# Altium PCB ExtPlatePCB1.PcbDoc
Units mm, origin at the board's own origin, x right, y up, seen from the top; angles counter-clockwise.
Board outline 68.58 x 53.34 mm, 2 copper layers (Top Layer, Bottom Layer); 83 components, 75 nets, 307 pads, 31 vias.
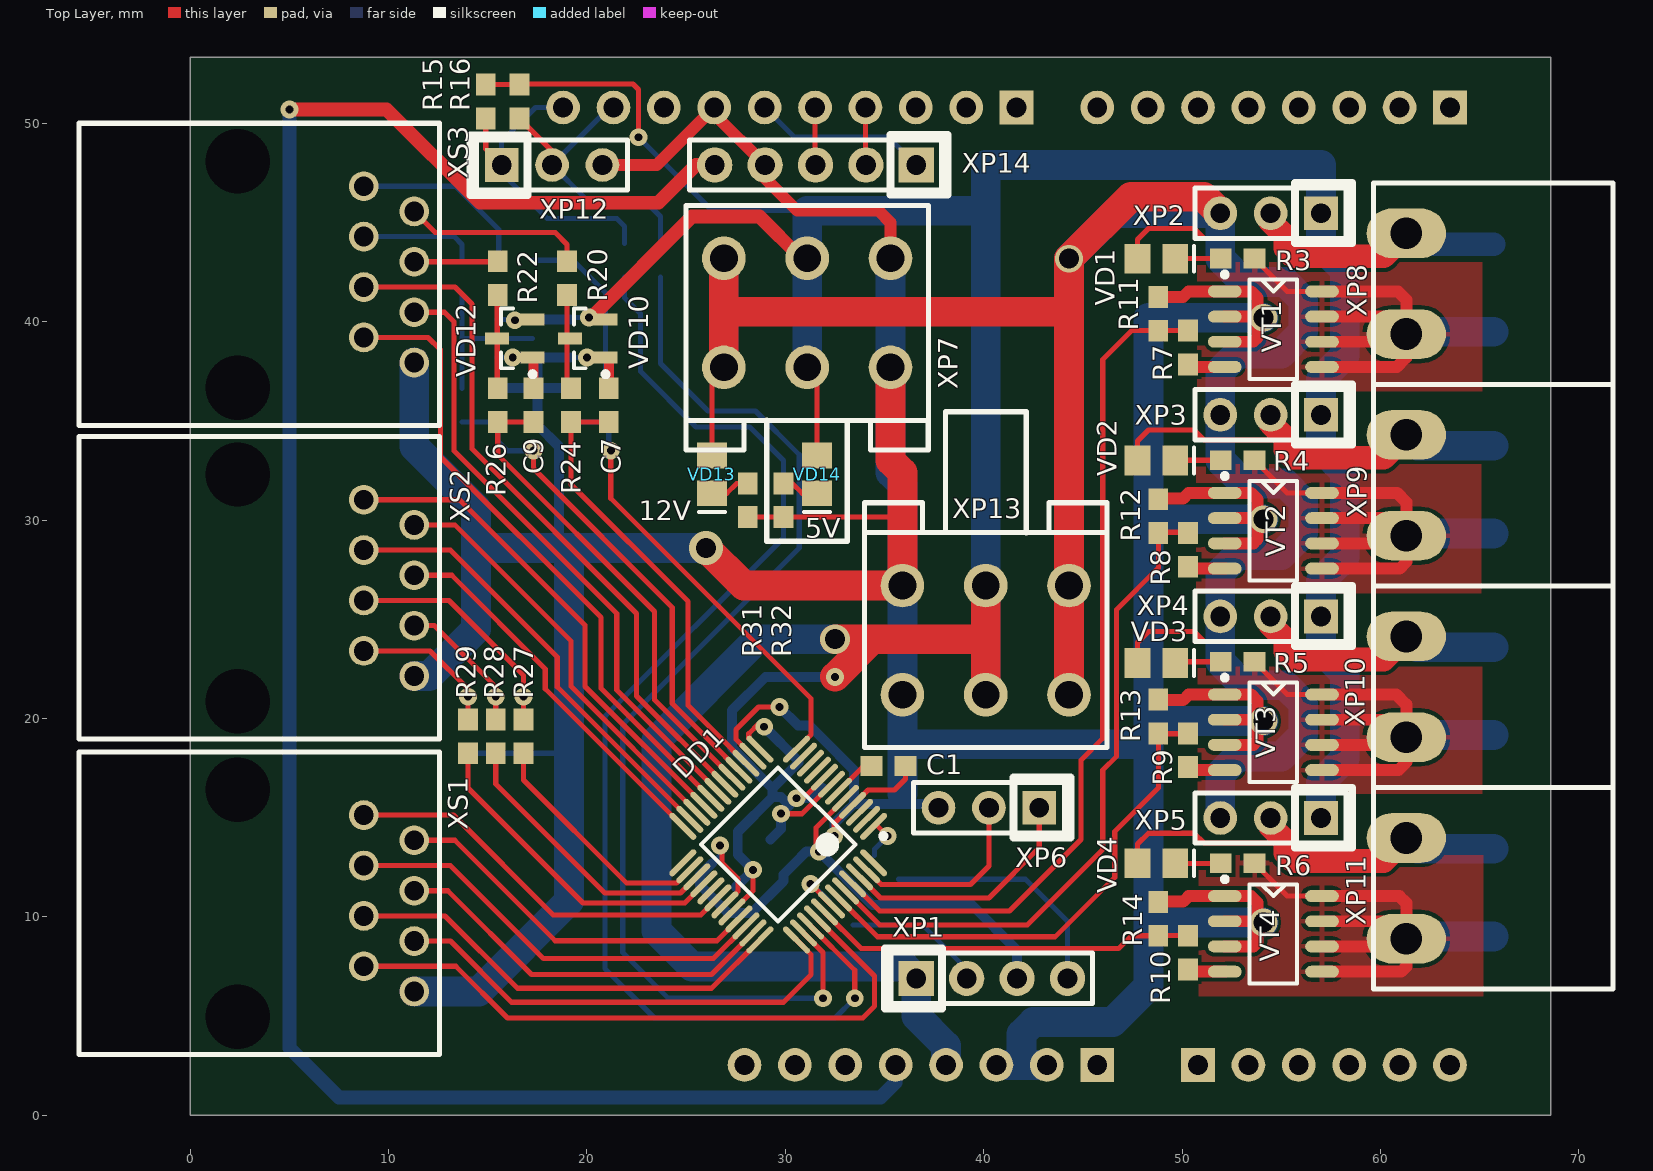
[diagram p0: Top Layer view]
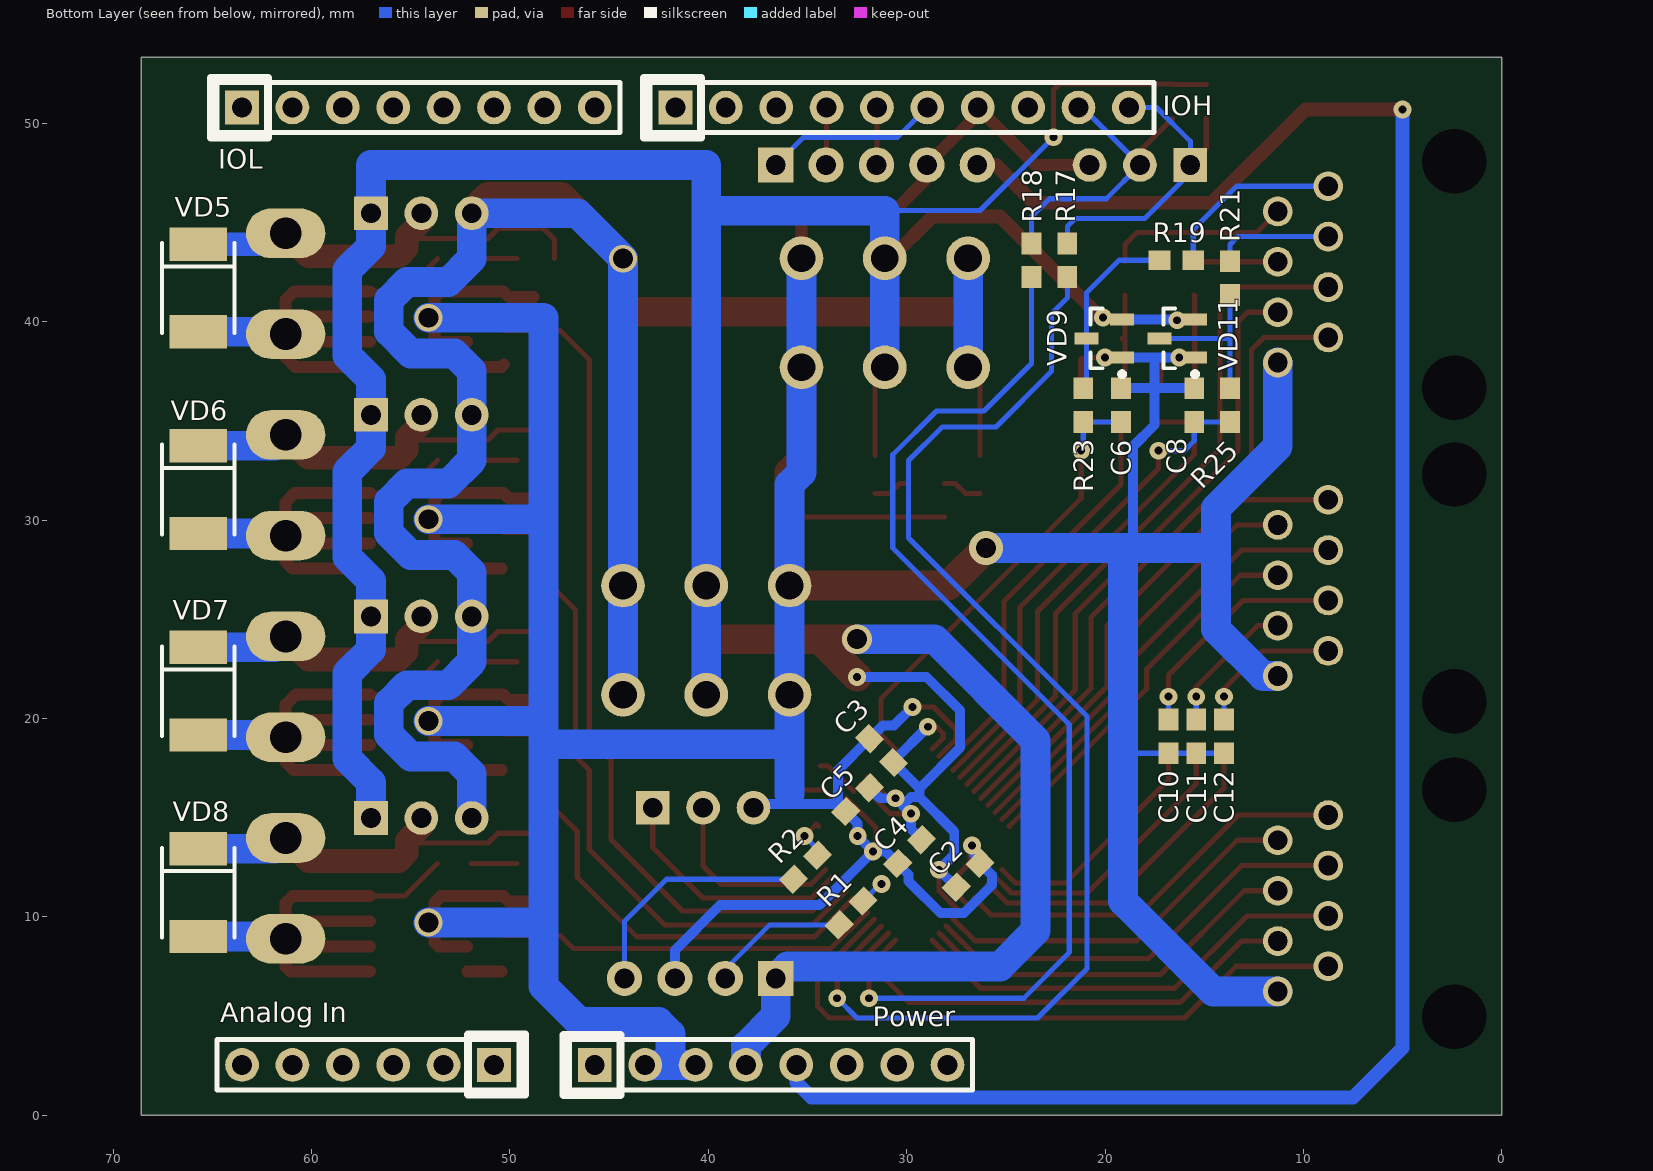
[diagram p1: Bottom Layer view, seen from below]
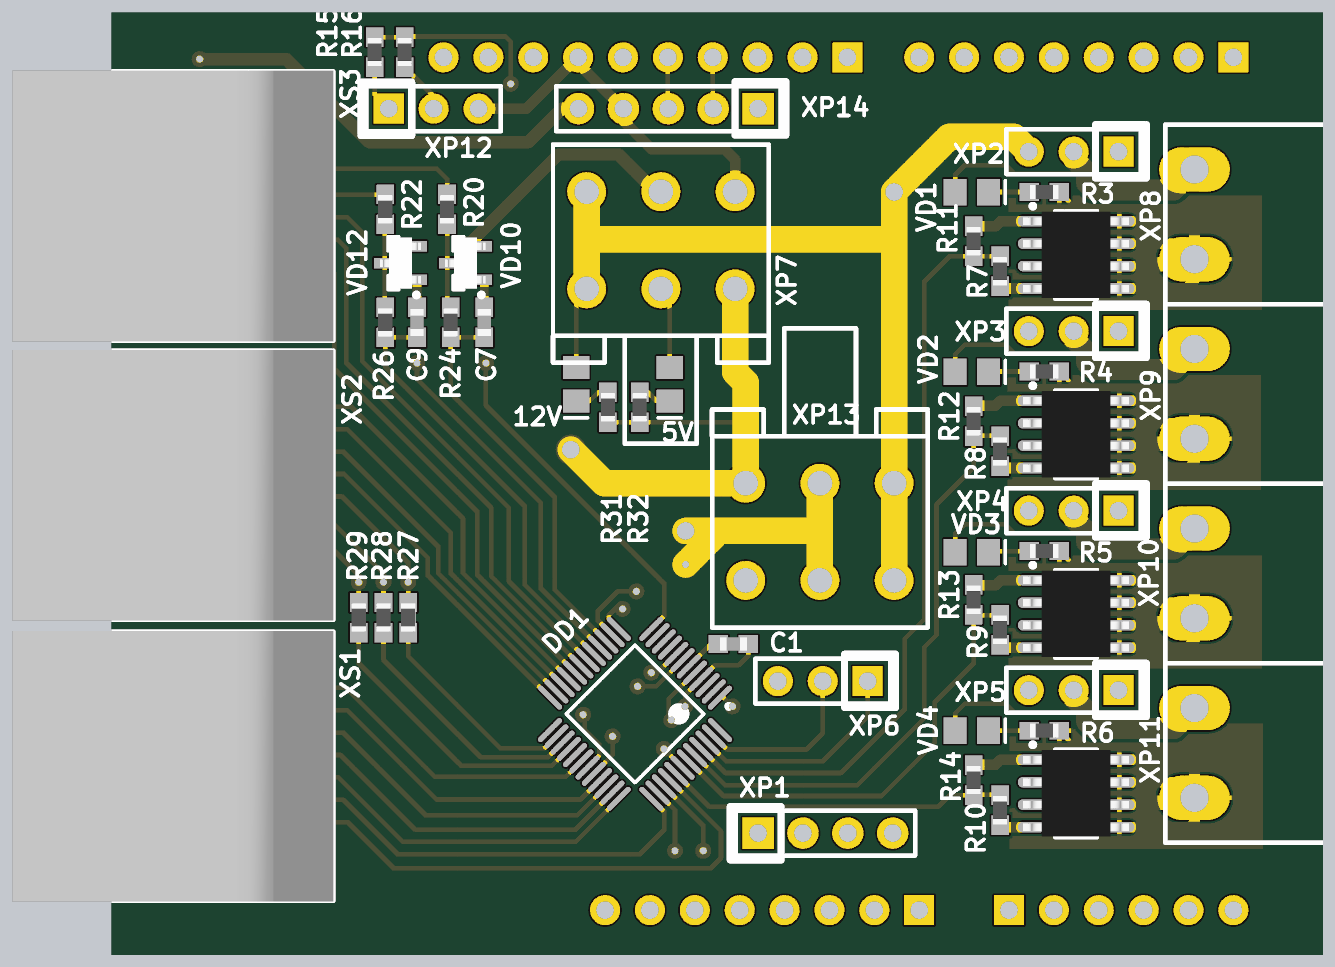
[diagram p2: 3D render of the assembled board from above, using the file's embedded part models]
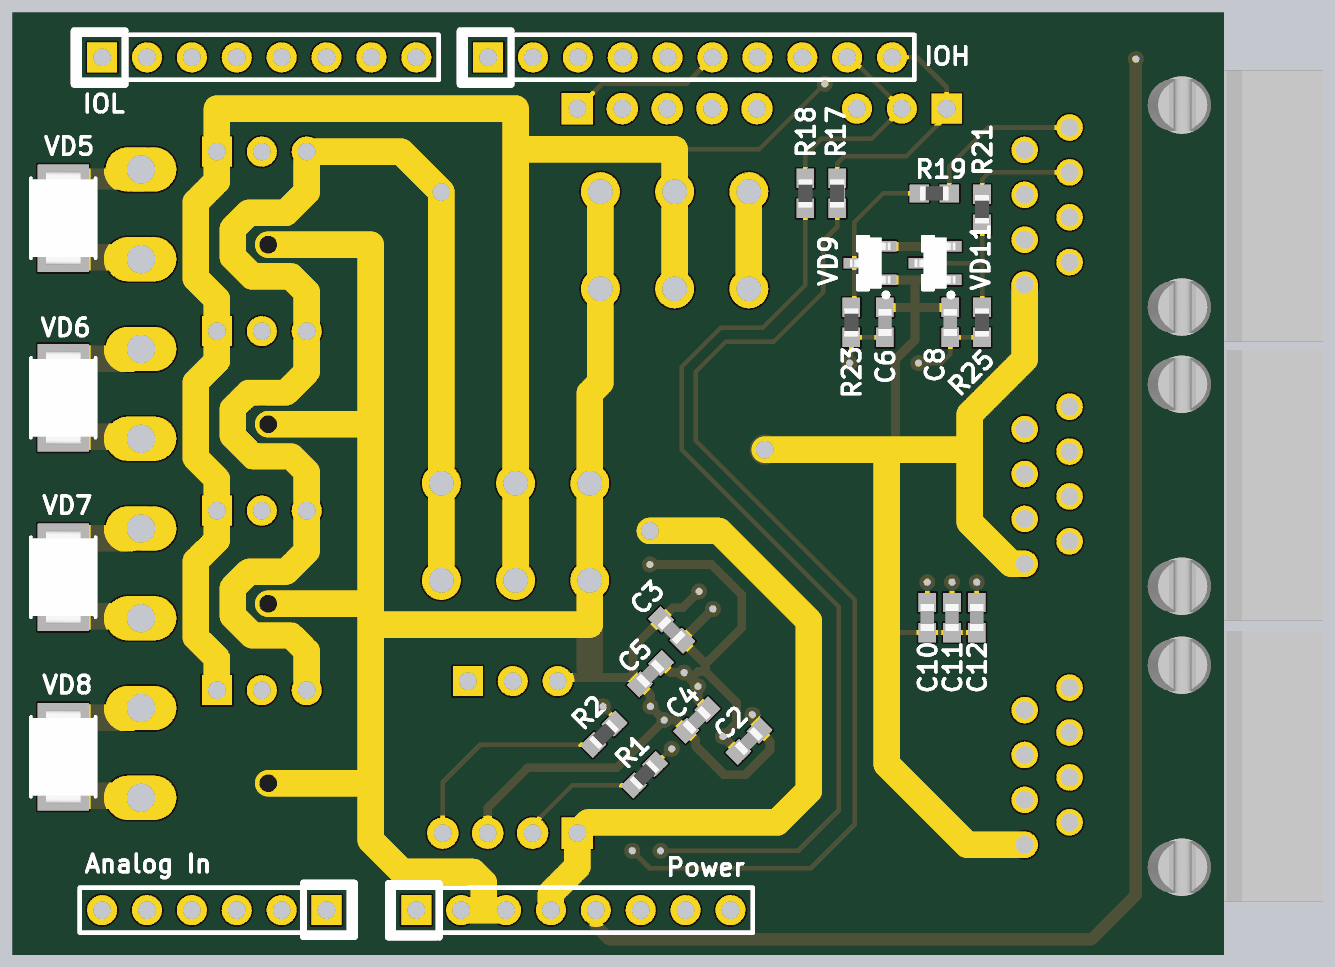
[diagram p3: 3D render of the assembled board from below, using the file's embedded part models]

## Layer stack, top to bottom
Top Layer: signal copper 0.0356
Dielectric: dielectric 0.32, FR-4, Dk 4.8
Bottom Layer: signal copper 0.0356

## Board outline
0,0 68.58,0 68.58,53.34 0,53.34

## Design rules (kind name [scope] priority, off if disabled: settings)
Clearance [All] p1: gap=0.2
PolygonConnect [All] p1: connectstyle=Relief reliefconductorwidth=0.254 reliefentries=4 polygonreliefangle="90 Angle"
RoutingVias [All] p1: holewidth=0.4 width=0.9 viastyle="Through Hole" minholewidth=0.4 minwidth=0.9 maxholewidth=5 maxwidth=5
SilkscreenOverComponentPads [All] p1: minsilkscreentomaskgap=0.254
SolderMaskExpansion [All] p1: expansion=0.102
Width [All] p1: maxlimit=4 minlimit=0.2 preferedwidth=0.26
27 further rules are at their usual default settings.

## Components (designator, comment, footprint, x,y, rotation, side; value= is the part's Value field where it differs from the comment)
"Analog In" "AD" PLS6 50.8,2.54 r0 bottom locked (schematic designator AD1)
C1 "1.0uF" C-1608[0603] 35.2,17.6 r180 top
C2 "0.1uF" C-1608[0603] 26.9,12.1 r135 bottom
C3 "0.1uF" C-1608[0603] 31.266,18.384 r45 bottom
C4 "0.1uF" C-1608[0603] 29.851,13.293 r315 bottom
C5 "0.1uF" C-1608[0603] 32.468,15.909 r315 bottom
C6 "1nF" C-1608[0603] 19.2,35.8 r90 bottom
C7 "1nF" C-1608[0603] 21.1,35.8 r90 top
C8 "1nF" C-1608[0603] 15.5,35.8 r90 bottom
C9 "1nF" C-1608[0603] 17.3,35.8 r90 top
C10 "0.1uF" C-1608[0603] 16.8,19.1 r270 bottom
C11 "0.1uF" C-1608[0603] 15.4,19.1 r270 bottom
C12 "0.1uF" C-1608[0603] 14,19.1 r270 bottom
DD1 "STM8S105C6" LQFP48_N 29.639,13.646 r225 top
IOH "IOH" PLS10 41.656,50.8 r180 bottom locked (schematic designator IOH1)
IOL "IOL" PLS8 63.5,50.8 r180 bottom locked (schematic designator IOL1)
Power "POWER_UNO" PLS8 45.72,2.54 r180 bottom locked (schematic designator POWER1)
R1 "100" R-1608[0603] 32.8,10.2 r135 bottom
R2 "100" R-1608[0603] 35.1,12.5 r135 bottom
R3 "1K" R-1608[0603] 52.8,43.18 r0 top
R4 "1K" R-1608[0603] 52.8,33.02 r0 top
R5 "1K" R-1608[0603] 52.8,22.86 r0 top
R6 "1K" R-1608[0603] 52.8,12.7 r0 top
R7 "1K" R-1608[0603] 50.3,38.7 r90 top
R8 "1K" R-1608[0603] 50.3,28.5 r90 top
R9 "1K" R-1608[0603] 50.3,18.4 r90 top
R10 "1K" R-1608[0603] 50.3,8.2 r90 top
R11 "10K" R-1608[0603] 48.8,40.4 r270 top
R12 "10K" R-1608[0603] 48.8,30.2 r270 top
R13 "10K" R-1608[0603] 48.8,20.1 r270 top
R14 "10K" R-1608[0603] 48.8,9.9 r270 top
R15 "4.7K" R-1608[0603] 14.9,51.1 r90 top
R16 "4.7K" R-1608[0603] 16.6,51.1 r90 top
R17 "100" R-1608[0603] 21.9,43.1 r90 bottom
R18 "100" R-1608[0603] 23.7,43.1 r90 bottom
R19 "4.7K" R-1608[0603] 16.4,43.1 r180 bottom
R20 "4.7K" R-1608[0603] 19,42.2 r90 top
R21 "4.7K" R-1608[0603] 13.7,42.2 r90 bottom
R22 "4.7K" R-1608[0603] 15.5,42.2 r90 top
R23 "4.7K" R-1608[0603] 21.1,35.8 r90 bottom
R24 "4.7K" R-1608[0603] 19.2,35.8 r90 top
R25 "4.7K" R-1608[0603] 13.7,35.8 r90 bottom
R26 "4.7K" R-1608[0603] 15.5,35.8 r90 top
R27 "750" R-1608[0603] 16.8,19.1 r90 top
R28 "750" R-1608[0603] 15.4,19.1 r90 top
R29 "750" R-1608[0603] 14,19.1 r90 top
R31 "1K" R-1608[0603] 28.1,31 r270 top
R32 "510" R-1608[0603] 29.9,31 r270 top
VD1 "KB170G" LED-2012[0805] 48.7,43.18 r180 top
VD2 "KB170G" LED-2012[0805] 48.7,33 r180 top
VD3 "KB170G" LED-2012[0805] 48.7,22.8 r180 top
VD4 "KB170G" LED-2012[0805] 48.7,12.7 r180 top
VD5 "MBRS140T3G" SMB 65.7,41.7 r270 bottom
VD6 "MBRS140T3G" SMB 65.7,31.54 r270 bottom
VD7 "MBRS140T3G" SMB 65.7,21.38 r270 bottom
VD8 "MBRS140T3G" SMB 65.7,11.22 r270 bottom
VD9 "BAT54S" SOT-23 20.038,39.156 r0 bottom
VD10 "BAT54S" SOT-23 20.038,39.156 r180 top
VD11 "BAT54S" SOT-23 16.362,39.156 r0 bottom
VD12 "BAT54S" SOT-23 16.362,39.156 r180 top
VD13 "12V" LED-2012[0805] 26.3,32.3 r90 top
VD14 "5V" LED-2012[0805] 31.6,32.3 r90 top
VT1 "IRF3717" SO8 54.6,39.624 r0 top
VT2 "IRF3717" SO8 54.6,29.464 r0 top
VT3 "IRF3717" SO8 54.6,19.304 r0 top
VT4 "IRF3717" SO8 54.6,9.144 r0 top
XP1 "PLS-4" PLS4 36.6,6.9 r0 top
XP2 "PLS-3" PLS3 57,45.466 r180 top
XP3 "PLS-3" PLS3 57,35.306 r180 top
XP4 "PLS-3" PLS3 57,25.146 r180 top
XP5 "PLS-3" PLS3 57,14.986 r180 top
XP6 "PLS-3" PLS3 42.8,15.5 r180 top
XP7 "MF-6M" MF-6M 26.9,37.7 r0 top
XP8 "2EDGR-5.08" 2EDGR-5.08 61.3,44.457 r0 top locked
XP9 "2EDGR-5.08" 2EDGR-5.08 61.3,34.297 r0 top locked
XP10 "2EDGR-5.08" 2EDGR-5.08 61.3,24.137 r0 top locked
XP11 "2EDGR-5.08" 2EDGR-5.08 61.3,13.977 r0 top locked
XP12 "PLS-3" PLS3 15.7,47.9 r0 top
XP13 "MF-6M" MF-6M 44.3,26.7 r180 top
XP14 "PLS-5" PLS5 36.6,47.9 r180 top
XS1 "5555164-1" "RJ45 8PIN" 2.4,16.4 r270 top
XS2 "5555164-1" "RJ45 8PIN" 2.4,32.3 r270 top
XS3 "5555164-1" "RJ45 8PIN" 2.4,48.1 r270 top

## Footprints (in the part's own frame and the unit in brackets; to place one, negate y for a bottom-side part, rotate by r counter-clockwise, add the part's x,y. Pads: shape width x height; smd on the part's side, far side on the other; paste and mask are expansions set on the pad)
2EDGR-5.08 [mm]
  oval 4x2.5 hole 1.6: 1(0,0) 2(0,-5.08)
  silkscreen extent -1.65,-7.62 10.41,2.54, body extent -1.52,-7.49 10.29,2.41, height 8.3
C-1608[0603] [mm]
  rect 1.1x1 smd: 1(-0.85,0) 2(0.85,0)
  body extent -0.76,-0.38 0.76,0.38, height 0.5
LED-2012[0805] [mm]
  rect 1.3x1.5 smd: 1(-0.95,0) 2(0.95,0)
  silkscreen extent -1.9,-0.65 -1.9,0.65, body extent -1.4,-0.76 1.4,0.76, height 1.1
LQFP48_N [mm] "Thin QFP, 48-Leads, Body 7x7mm, Pitch 0.5mm, IPC Medium Density"
  oval 1.8x0.3 smd: 1(-4.05,2.75) 2(-4.05,2.25) 3(-4.05,1.75) 4(-4.05,1.25) 5(-4.05,0.75) 6(-4.05,0.25) 7(-4.05,-0.25) 8(-4.05,-0.75) 9(-4.05,-1.25) 10(-4.05,-1.75) 11(-4.05,-2.25) 12(-4.05,-2.75) 25(4.05,-2.75) 26(4.05,-2.25) 27(4.05,-1.75) 28(4.05,-1.25) 29(4.05,-0.75) 30(4.05,-0.25) 31(4.05,0.25) 32(4.05,0.75) 33(4.05,1.25) 34(4.05,1.75) 35(4.05,2.25) 36(4.05,2.75)
  oval 0.3x1.8 smd: 13(-2.75,-4.05) 14(-2.25,-4.05) 15(-1.75,-4.05) 16(-1.25,-4.05) 17(-0.75,-4.05) 18(-0.25,-4.05) 19(0.25,-4.05) 20(0.75,-4.05) 21(1.25,-4.05) 22(1.75,-4.05) 23(2.25,-4.05) 24(2.75,-4.05) 37(2.75,4.05) 38(2.25,4.05) 39(1.75,4.05) 40(1.25,4.05) 41(0.75,4.05) 42(0.25,4.05) 43(-0.25,4.05) 44(-0.75,4.05) 45(-1.25,4.05) 46(-1.75,4.05) 47(-2.25,4.05) 48(-2.75,4.05)
  silkscreen extent -4.17,-2.75 2.75,3.57, body extent -3.5,-3.5 3.5,3.5, height 1.6
MF-6M [mm]
  round 2.2 hole 1.4: 1(0,5.5) 2(4.2,5.5) 3(8.4,5.5) 4(0,0) 5(4.2,0) 6(8.4,0)
  silkscreen extent -1.91,-8.76 10.31,8.17, body extent -1.91,-2.67 10.31,8.17, height 12.9
PLS3 [mm]
  rect 1.7x1.7 hole 1: 1(0,0)
  round 1.7 hole 1: 2(2.54,0) 3(5.08,0)
  silkscreen extent -1.58,-1.53 6.35,1.5, body extent -1.27,-1.3 6.3,1.3, height 8.54
PLS4 [mil]
  rect 70x70 hole 39.37: 1(0,0)
  round 70 hole 39.37: 2(100,0) 3(200,0) 4(300,0)
  silkscreen extent -62,-60 350,59, body extent -50,-50 350,50, height 336
PLS5 [mil]
  rect 70x70 hole 39.37: 1(0,0)
  round 70 hole 39.37: 2(100,0) 3(200,0) 4(300,0) 5(400,0)
  silkscreen extent -62,-60 450,59, body extent -50,-50 450,50, height 336
PLS6 [mm]
  rect 1.7x1.7 hole 1: 1(0,0)
  round 1.7 hole 1: 2(2.54,0) 3(5.08,0) 4(7.62,0) 5(10.16,0) 6(12.7,0)
  silkscreen extent -1.58,-1.53 13.97,1.5, body extent -1.27,-1.27 13.97,1.27, height 8.54
PLS8 [mm]
  rect 1.7x1.7 hole 1: 1(0,0)
  round 1.7 hole 1: 2(2.54,0) 3(5.08,0) 4(7.62,0) 5(10.16,0) 6(12.7,0) 7(15.24,0) 8(17.78,0)
  silkscreen extent -1.58,-1.53 19.05,1.5, body extent -1.27,-1.27 19.05,1.27, height 8.54
PLS10 [mm]
  rect 1.7x1.7 hole 1: 1(0,0)
  round 1.7 hole 1: 2(2.54,0) 3(5.08,0) 4(7.62,0) 5(10.16,0) 6(12.7,0) 7(15.24,0) 8(17.78,0) 9(20.32,0) 10(22.86,0)
  silkscreen extent -1.58,-1.53 24.13,1.5, body extent -1.27,-1.27 24.13,1.27, height 8.54
R-1608[0603] [mm]
  rect 1.1x1 smd: 1(-0.85,0) 2(0.85,0)
  body extent -1.2,-1.2 1.2,1.2, height 0.37
"RJ45 8PIN" [mm]
  round 0 hole 3.25 unplated: 0(0,0) 0(11.43,0)
  round 1.5 hole 1: 1(1.27,6.35) 2(2.54,8.89) 3(3.81,6.35) 4(5.08,8.89) 5(6.35,6.35) 6(7.62,8.89) 7(8.89,6.35) 8(10.16,8.89)
  silkscreen extent -1.91,-8 13.34,10.16, body extent -1.94,-8 13.37,10.16, height 12.29
SMB [mil] "http://www.vishay.com/docs/95017/smb.pdf"
  rect 66x114 smd mask+4: 1(-87,0) 2(87,0)
  silkscreen extent -89,-72 89,72, body extent -104,-70 104,70, height 85
SO8 [mm] "SOIC, 8-Leads, Body 4.9x3.9mm, Pitch 1.27mm, IPC High Density"
  oval 1.7x0.6 smd: 1(-2.45,1.905) 2(-2.45,0.635) 3(-2.45,-0.635) 4(-2.45,-1.905) 5(2.45,-1.905) 6(2.45,-0.635) 7(2.45,0.635) 8(2.45,1.905)
  silkscreen extent -2.57,-2.5 1.2,2.88, body extent -3,-2.45 3,2.45, height 1.53
SOT-23 [mm] "SOT23, 3-Leads, Body 2.9x1.3mm, Pitch 0.95mm, Lead Span 2.5mm, IPC High Density"
  rect 1.2x0.6 smd: 1(-0.9,0.95) 2(-0.9,-0.95) 3(0.9,0)
  silkscreen extent -1.02,-1.5 0.7,1.92, body extent -1.15,-1.45 1.15,1.45, height 1

## Part data
C1 C2 C3 C4 C5 C6 C7 C8 C9 C10 C11 C12: library part C-0603, "C-0603"
DD1: library part STM8S105C, "Access line, 16 MHz STM8S 8-bit MCU"
R1 R2 R3 R4 R5 R6 R7 R8 R9 R10 R11 R12 R13 R14 R15 R16 R17 R18 R19 R20 R21 R22 R23 R24 R25 R26 R27 R28 R29 R31 R32: library part R-0603, "R-0603"
VD1 VD2 VD3 VD4: "Green Led 0805"
VD5 VD6 VD7 VD8: "Surface Mount Schottky Power Rectifier"
VD9 VD10 VD11 VD12: "Schottky barrier (double) diodes"
VD13 VD14: library part KB170G, "Green Led 0805"
XP7 XP13: "Mini-Fit 6 pin Connector on board."
XS1 XS2 XS3: "PCB Mounted Jacks - Single Port, Multi-port and Stacked"

## Via types
v1: diameter 0.9, hole 0.4, Top Layer to Bottom Layer, tented both sides, 24 vias
v2: diameter 1.4, hole 1, Top Layer to Bottom Layer, tented both sides, 5 vias
v3: diameter 1.7, hole 1, Top Layer to Bottom Layer, tented both sides, 1 vias
v4: diameter 1.5, hole 1, Top Layer to Bottom Layer, tented both sides, 1 vias

## Nets (pads, with @x,y where several pads share a name; then routed paths per layer and width w, separated by ;. In a path a pad name is that pad's centre, name@x,y a point inside that pad or via, vN(x,y) a via of type N, cw(c..) or ccw(c..) an arc to the next point about the centre after c; other vN are vias at no path point)
3V3: Power.5 XP14.5 | length 104.3
  Top Layer w0.7: v1(5,50.7) 9.9,50.7 14.6,46 23.6,46 25.5,47.9 XP14.5
  Bottom Layer w0.7: v1(5,50.7) 5,3.4 7.5,0.9 34.8,0.9 35.56,1.66 Power.5
+5V: C2.1 C3.1 C4.1 C5.1 DD1.7 DD1.8 DD1.13 DD1.32 Power.4 R15.2 R16.2 VD9.2 VD10.2 VD11.2 VD12.2 VD14.2 XP1.1 XP2.1 XP3.1 XP4.1 XP5.1 XP7.2 XP7.5 XP13.2 XP13.5 | length 233.8
  Top Layer w0.26: R15.2 R16.2 16.63,51.98 22.32,51.98 22.6,51.7 v1(22.6,49.3) ; v1(16.362,40.075) 17.231,40.075 VD12.2 ; v1(20.109,40.216) 20.22,40.106 VD10.2 ; DD1.32 28.367,11.313 v1(28.367,12.374) ; DD1.13 28.154,19.02 28.154,19.233 28.649,19.728 v1@28.791,19.728 ; v1(29.781,15.202) 30.841,15.202 DD1.7 31.549,15.909 ; v1@30.912,15.98 DD1.8 ; XP7.5 31.6,37.2 VD14.2
  Top Layer w0.7: v1@20.216,40.216 25.3,45.3 28.7,45.3 30.8,43.2 XP7.2
  Top Layer w1.5: v1(32.5,22.1) 34.4,24 ; v4(32.5,24) 34.4,24 ; XP13.2 40.1,24 ; XP13.5 40.1,24 ; 34.4,24 40.1,24
  Bottom Layer w0.26: VD11.2 16.331,40.106 v1(16.362,40.075) v1@16.392,40.106 ; VD9.2 19.249,40.216 v1(20.109,40.216) ; v1(22.6,49.3) 26.3,45.6 31.1,45.6
  Bottom Layer w0.5: v1@16.392,40.106 VD9.2 ; C2.1@27.501,11.501 v1@28.367,12.367 ; v1(28.367,12.374) 27.6,13.14 27.6,14.294 29.357,16.051 ; v1(28.932,19.586) C3.1@30.665,17.854 ; C4.1 29.781,14.424 v1(29.781,15.202) 30.205,15.626 29.781,16.051 29.357,16.051 ; v1(30.559,15.98) 31.336,15.98 C5.1 ; C3.1 29.357,16.475 ; v1(32.5,22.1) 29,22.1 27.3,20.4 27.3,18.531 29.357,16.475 ; 29.357,16.051 29.357,16.475
  Bottom Layer w0.7: Power.4 Power.4@38.1,2.9
  Bottom Layer w1.5: XP7.5 XP7.2 31.1,45.6 40.1,45.6 ; v4(32.5,24) 28.6,24 23.5,18.9 23.5,9.3 25.3,7.5 36,7.5 XP1.1 36.6,5 38.1,3.5 Power.4 ; XP13.2 XP13.5 40.1,45.6 ; XP5.1 57,16.78 58.2,17.98 58.2,22.28 57,23.48 XP4.1 57,26.94 58.2,28.14 58.2,32.44 57,33.64 XP3.1 57,37.1 58.2,38.3 58.2,42.6 57,43.8 XP2.1 57,47.9 40.1,47.9 40.1,45.6
+12V: VD13.2 XP2.3 XP3.3 XP4.3 XP5.3 XP7.1 XP7.4 XP13.1 XP13.4 | length 143.3
  Top Layer w0.26: VD13.2 26.3,37.1 XP7.4
  Top Layer w1.5: XP7.4 26.9,40.5 ; XP7.1 26.9,40.5 ; XP13.1 XP13.4 44.3,40.5 ; XP2.3 51.086,46.3 47.42,46.3 v2(44.3,43.18) 44.3,40.5 ; 26.9,40.5 44.3,40.5
  Bottom Layer w1.5: XP7.4 XP7.1 ; XP13.1 v2(44.3,43.18) 46.586,45.466 XP2.3 51.92,43.18 53.1,42 55.2,42 56.1,41.1 56.1,39.5 55,38.4 52.8,38.4 51.92,37.52 XP3.3 51.92,33.02 53.1,31.84 55.2,31.84 56.1,30.94 56.1,29.34 55,28.24 52.8,28.24 51.92,27.36 XP4.3 51.92,22.86 53.1,21.68 55.2,21.68 56.1,20.78 56.1,19.18 55,18.08 52.8,18.08 51.92,17.2 XP5.3
AI_0: DD1.21 XS2.1 | length 25.3
  Top Layer w0.26: XS2.1 13.57,31.03 19.9,24.7 19.9,21.618 DD1.21
AI_1: DD1.22 XS2.2 | length 21.6
  Top Layer w0.254: XS2.2 13.34,29.76 19.2,23.9 19.2,21.611 DD1.22
AI_2: DD1.23 XS2.3 | length 22.9
  Top Layer w0.26: XS2.3 13.11,28.49 18.5,23.1 18.5,21.604 DD1.23
AI_3: DD1.24 XS2.4 | length 19.4
  Top Layer w0.26: XS2.4@11.329,27.22 XS2.4 13.18,27.22 17.9,22.5 17.9,21.497 DD1.24
AO_0: C10.1 R27.2 XS2.5 | length 13
  Top Layer w0.26: XS2.5 13.05,25.95 16.8,22.2 R27.2
  Bottom Layer w0.26: C10.1 v1(16.8,21.1)
AO_1: C11.1 R28.2 XS2.6 | length 8.2
  Top Layer w0.26: XS2.6 12.32,24.68 15.4,21.6 R28.2
  Bottom Layer w0.26: C11.1 v1(15.4,21.1)
AO_2: C12.1 R29.2 XS2.7 | length 8.7
  Top Layer w0.26: XS2.7 12.09,23.41 14,21.5 R29.2
  Bottom Layer w0.26: C12.1 v1(14,21.1)
EXTDI_0: R19.2 XS3.1 | length 9.3
  Bottom Layer w0.26: XS3.1 13.37,46.83 15.55,44.65 R19.2
EXTDI_1: R20.2 XS3.2 | length 9.2
  Top Layer w0.26: XS3.2 12.35,44.5 18.4,44.5 19,43.9 R20.2
EXTDI_2: R21.2 XS3.3 | length 6.1
  Top Layer w0.26: XS3.3 XS3.3@8.83,44.21
  Bottom Layer w0.26: XS3.3 13.31,44.29 13.7,43.9 R21.2
EXTDI_3: R22.2 XS3.4 | length 4.2
  Top Layer w0.26: XS3.4 R22.2@15.47,43.02
EXTDIO_0: DD1.18 XS3.5 | length 35.3
  Top Layer w0.26: XS3.5 13.35,41.75 14.2,40.9 14.2,33.6 22.5,25.3 22.5,21.139 DD1.18
EXTDIO_1: DD1.19 XS3.6 | length 31.4
  Top Layer w0.26: XS3.6 12.82,40.48 13.3,40 13.3,33.5 21.5,25.3 21.5,21.432 DD1.19
EXTDIO_2: DD1.20 XS3.7 | length 32.4
  Top Layer w0.26: XS3.7 11.99,39.21 12.615,38.585 12.615,33.185 20.7,25.1 20.7,21.525 DD1.20
EXTDIO_3: DD1.30 XS1.1 | length 20.3
  Top Layer w0.26: XS1.1 13.27,15.13 18.3,10.1 25.739,10.1 DD1.30
EXTDIO_4: DD1.33 XS1.2 | length 18.9
  Top Layer w0.26: XS1.2 13.34,13.86 18.4,8.8 26.561,8.8 DD1.33
EXTDIO_5: DD1.34 XS1.3 | length 21.9
  Top Layer w0.26: XS1.3 13.11,12.59 17.8,7.9 26.368,7.9 DD1.34
EXTDIO_6: DD1.35 XS1.4 | length 19.7
  Top Layer w0.26: XS1.4 12.98,11.32 17.2,7.1 26.275,7.1 DD1.35
EXTDIO_7: DD1.36 XS1.5 | length 22.5
  Top Layer w0.26: XS1.5 12.85,10.05 16.5,6.4 26.282,6.4 DD1.36
EXTDIO_8: DD1.37 XS1.6 | length 23.9
  Top Layer w0.26: XS1.6 13.12,8.78 16.2,5.7 29.9,5.7 31.3,7.1 31.3,8.097 DD1.37
EXTDIO_9: DD1.40 XS1.7 | length 32.7
  Top Layer w0.26: XS1.7 13.39,7.51 16,4.9 33.9,4.9 34.5,5.5 34.5,7.018 DD1.40
GND: C1.1 C2.2 C3.2 C4.2 C5.2 C6.2 C7.2 C8.2 C9.2 C10.2 C11.2 C12.2 DD1.4 DD1.5 DD1.14 DD1.31 IOH.7 Power.2 Power.3 R11.1 R12.1 R13.1 R14.1 R31.2 R32.2 VD9.1 VD10.1 VD11.1 VD12.1 VT1.1 VT1.2 VT1.3 VT2.1 VT2.2 VT2.3 VT3.1 VT3.2 VT3.3 VT4.1 VT4.2 VT4.3 XP1.3 XP6.3 XP7.3 XP7.6 XP12.3 XP13.3 XP13.6 XP14.4 XS1.8 XS2.8 XS3.8 | length 340
  Top Layer w0.26: VD12.1@17.21,38.154 VD12.1 ; v1(19.999,38.206) VD10.1 ; v1@26.8,13.5 26.8,12.715 27.609,11.906 27.609,11.291 26.952,10.634 DD1.31 ; R31.2 35.75,30.15 ; DD1.14 27.518,18.95 27.518,19.445 28.649,20.576 v1(29.711,20.576) ; v1@31.549,13.434 31.549,14.495 DD1.5 ; v1(32.468,14.071) 32.468,14.707 DD1.4 34.161,16.4 35.5,16.4 36.05,16.95 C1.1
  Top Layer w0.5: C9.2 VD12.1@17.3,38.064 ; C7.2 VD10.1@21.1,38.044
  Top Layer w0.6: XP12.3 23.516,47.9 IOH.7 26.416,50.464 XP14.4 28.98,47.22 30.6,45.6 34.7,45.6 35.3,45 XP7.3 ; R14.1@48.8,10.77 50.05,10.77 50.329,11.049 53.471,11.049 53.8,10.72 53.8,8.72 53.589,8.509 VT4.3 ; R13.1@48.8,20.93 50.05,20.93 50.329,21.209 53.471,21.209 53.8,20.88 53.8,18.88 53.589,18.669 VT3.3 ; R12.1@48.8,31.09 50.05,31.09 50.329,31.369 53.471,31.369 53.8,31.04 53.8,29.04 53.589,28.829 VT2.3 ; R11.1 50.05,41.25 50.329,41.529 VT1.1 53.471,41.529 53.8,41.2 53.8,39.2 53.589,38.989 VT1.3 ; VT4.2 v2@53.741,9.779 ; VT3.2 v2@53.741,19.939 ; VT2.2 v2@53.741,30.099 ; VT1.2 v2@53.741,40.259
  Top Layer w1.5: v3(26,28.6) 27.9,26.7 XP13.6 35.9,32.4 35.3,33 XP7.6
  Bottom Layer w0.26: C12.2 C11.2 C10.2 19.05,18.25 ; VD11.1 v1(16.26,38.206) ; VD9.1 v1(19.999,38.206) ; C2.2 26.7,13.102 v1(26.7,13.6) v1@26.7,13.7
  Bottom Layer w0.5: C8.2 17.5,36.65 ; v1(16.26,38.206) VD9.1 ; 17.5,38.071 17.5,36.65 ; 18.6,28.6 18.6,33.7 17.5,34.8 17.5,36.65 ; C6.2 17.5,36.65 ; C2.2 25.7,12.102 25.7,11.6 27.1,10.2 28.3,10.2 29.9,11.8 29.9,12.139 C4.2 31.054,13.293 v1(31.69,13.293) ; v1(29.711,20.576) 30.631,19.657 31.195,19.657 C3.2 33.458,17.394 33.458,15.697 ; XP6.3 37.523,15.697 33.458,15.697 ; XP1.3 41.68,8.32 39.4,10.6 34.383,10.6 v1(31.69,13.293) ; v1(31.69,13.293) 32.044,13.646 v1(32.468,14.071) 32.468,14.707 C5.2 33.458,15.697
  Bottom Layer w1.5: XS1.8 14.54,6.24 19.1,10.8 19.1,28.1 ; XS2.8 12.04,22.14 14.4,24.5 14.4,28.6 ; XS3.8 11.29,33.71 14.4,30.6 14.4,28.6 ; v3(26,28.6) 18.6,28.6 14.4,28.6 ; XP7.3 XP7.6 35.3,32.4 35.9,31.8 XP13.6 XP13.3 35.9,16.2 ; 35.9,18.7 48.3,18.7 ; Power.3 41.9,2.54 ; Power.2 41.9,2.54 ; v2(54.1,9.72) 48.3,9.72 ; v2(54.1,19.88) 48.3,19.88 ; v2(54.1,30.04) 48.3,30.04 ; v2(54.1,40.2) 48.3,40.2 48.3,30.04 ; 41.9,2.54 41.9,4.1 42.5,4.7 46.5,4.7 48.3,6.5 48.3,9.72 ; 48.3,9.72 48.3,18.7 ; 48.3,18.7 48.3,19.88 ; 48.3,19.88 48.3,30.04
I2C_SCL: IOH.10 R15.1 R17.2 XP12.1 | length 16.2
  Top Layer w0.26: R15.1 14.9,48.7 XP12.1
  Bottom Layer w0.26: IOH.10 17.4,50.8 15.7,49.1 XP12.1 15.7,47.5 18,45.2 21.5,45.2 21.9,44.8 R17.2
I2C_SDA: IOH.9 R16.1 R18.2 XP12.2 | length 15.2
  Top Layer w0.26: R16.1 18.24,48.61 XP12.2
  Bottom Layer w0.26: IOH.9 21.14,50.8 XP12.2 19.94,46.2 22.8,46.2 23.7,45.3 R18.2
IOREF: Power.7
NetC1_2: C1.2 DD1.6 | length 2.2
  Top Layer w0.26: DD1.6 33.946,17.6 C1.2
NetDD1_1: DD1.1 R2.2 | length 2.5
  Top Layer w0.26: DD1.1 34.554,14.672 v1(35.155,14.071)
  Bottom Layer w0.26: R2.2 34.499,13.415 v1(35.155,14.071) v1@35.155,13.859
NetDD1_38: DD1.38 R18.1 | length 56.8
  Top Layer w0.26: DD1.38 31.9,8.204 v1(31.9,5.9)
  Bottom Layer w0.26: R18.1 23.7,37.9 26.1,35.5 28.5,35.5 30.7,33.3 30.7,28.6 21.8,19.7 21.8,8.2 24.1,5.9 v1(31.9,5.9)
NetDD1_39: DD1.39 R17.1 | length 63.1
  Top Layer w0.26: 31.962,8.848 DD1.39 33.5,7.311 v1(33.5,5.9)
  Bottom Layer w0.26: R17.1 21.9,41.2 22.7,40.4 22.7,37.5 25.5,34.7 28.2,34.7 29.9,33 29.9,29.1 20.9,20.1 20.9,7.4 23.4,4.9 32.5,4.9 v1(33.5,5.9)
NetDD1_42: DD1.42 R1.2 | length 2.8
  Top Layer w0.26: v1(31.266,11.667) DD1.42
  Bottom Layer w0.26: v1(31.266,11.667) 31.333,11.667 R1.2
NetR3_1: R3.1 VD1.1 | length 2.3
  Top Layer w0.26: VD1.1 R3.1
NetR3_2: R3.2 VD5.2 VT1.5 VT1.6 VT1.7 VT1.8 XP8.2 | length 28.1
  Top Layer w0.26: R3.2 55.301,41.529 VT1.8
  Top Layer w0.6: VT1.5 60.819,37.719 61.3,38.2 XP8.2 ; VT1.6 60.912,38.989 XP8.2 ; VT1.7 XP8.2@60.418,40.259 ; VT1.8 60.871,41.529 61.3,41.1 XP8.2
  Bottom Layer w1.5: XP8.2 61.413,39.49 VD5.2
NetR4_1: R4.1 VD2.1 | length 2.3
  Top Layer w0.26: VD2.1@49.65,33.02 R4.1
NetR4_2: R4.2 VD6.2 VT2.5 VT2.6 VT2.7 VT2.8 XP9.2 | length 27.6
  Top Layer w0.26: R4.2 55.301,31.369 VT2.8
  Top Layer w0.6: VT2.5 60.959,27.559 61.3,27.9 XP9.2 61.3,30.9 60.831,31.369 VT2.8 ; VT2.6 XP9.2@60.912,28.829 ; VT2.7 XP9.2@60.418,30.099
  Bottom Layer w1.5: XP9.2 61.413,29.33 VD6.2
NetR5_1: R5.1 VD3.1 | length 2.3
  Top Layer w0.26: VD3.1@49.65,22.86 R5.1
NetR5_2: R5.2 VD7.2 VT3.5 VT3.6 VT3.7 VT3.8 XP10.2 | length 27.5
  Top Layer w0.26: R5.2 55.301,21.209 VT3.8
  Top Layer w0.6: VT3.5 60.899,17.399 61.3,17.8 61.3,20.7 60.791,21.209 VT3.8 ; VT3.6 XP10.2@60.912,18.669 ; VT3.7 XP10.2@60.418,19.939
  Bottom Layer w1.5: XP10.2 61.413,19.17 VD7.2
NetR6_1: R6.1 VD4.1 | length 2.3
  Top Layer w0.26: VD4.1 R6.1
NetR6_2: R6.2 VD8.2 VT4.5 VT4.6 VT4.7 VT4.8 XP11.2 | length 27.7
  Top Layer w0.26: R6.2 55.301,11.049 VT4.8
  Top Layer w0.6: VT4.5 61.039,7.239 61.3,7.5 XP11.2 61.3,10.7 60.951,11.049 VT4.8 ; VT4.6 XP11.2@60.912,8.509 ; VT4.7 XP11.2@60.418,9.779
  Bottom Layer w1.5: XP11.2 61.413,9.01 VD8.2
NetR7_1: R7.1 VT1.4 | length 1.9
  Top Layer w0.6: R7.1 50.431,37.719 VT1.4
NetR8_1: R8.1 VT2.4 | length 1.7
  Top Layer w0.6: R8.1@50.431,27.559 VT2.4
NetR9_1: R9.1 VT3.4 | length 1.7
  Top Layer w0.6: R9.1@50.431,17.399 VT3.4
NetR10_1: R10.1 VT4.4 | length 1.7
  Top Layer w0.6: R10.1@50.431,7.239 VT4.4
NetR19_1: R19.1 R23.2 VD9.3 | length 9
  Bottom Layer w0.26: R19.1 19.3,43.1 20.939,41.461 VD9.3 R23.2@20.939,36.812
NetR20_1: R20.1 R24.2 VD10.3 | length 4.8
  Top Layer w0.26: R20.1 19,36.85 R24.2 ; VD10.3@19.119,39.136 VD10.3
NetR21_1: R21.1 R25.2 VD11.3 | length 8.2
  Bottom Layer w0.26: R25.2 R21.1 ; 13.744,39.156 VD11.3
NetR22_1: R22.1 R26.2 VD12.3 | length 4.7
  Top Layer w0.26: R26.2 15.48,36.67 15.48,41.33 R22.1
NetR31_1: R31.1 VD13.1 | length 2
  Top Layer w0.26: VD13.1 27.05,31.35 27.55,31.85 R31.1
NetR32_1: R32.1 VD14.1 | length 1.9
  Top Layer w0.26: R32.1 30.35,31.85 30.85,31.35 VD14.1
NetVD1_2: VD1.2 VD5.1 XP2.2 XP8.1 | length 22.5
  Top Layer w0.26: VD1.2 47.75,44.15 48.3,44.7 50.6,44.7 51.1,44.2 54.7,44.2 55.2,43.7
  Top Layer w1.2: XP2.2 54.46,45.04 55.2,44.3 55.2,43.7 55.6,43.3 60.143,43.3 XP8.1
  Bottom Layer w1.2: XP8.1 61.847,43.91 VD5.1
NetVD2_2: VD2.2 VD6.1 XP3.2 XP9.1 | length 21.8
  Top Layer w0.26: VD2.2@47.75,33.02 47.75,33.99 48.3,34.54 50.6,34.54 51.1,34.04 54.7,34.04
  Top Layer w1.2: XP3.2 54.46,34.88 55.2,34.14 55.2,33.54 55.6,33.14 60.143,33.14 XP9.1
  Bottom Layer w1.5: XP9.1 61.847,33.75 VD6.1
NetVD3_2: VD3.2 VD7.1 XP4.2 XP10.1 | length 21.8
  Top Layer w0.26: VD3.2@47.75,22.86 47.75,23.83 48.3,24.38 50.6,24.38 51.1,23.88 54.7,23.88
  Top Layer w1.2: XP4.2 54.46,24.72 55.2,23.98 55.2,23.38 55.6,22.98 60.143,22.98 XP10.1
  Bottom Layer w1.5: XP10.1 61.847,23.59 VD7.1
NetVD4_2: VD4.2 VD8.1 XP5.2 XP11.1 | length 21.8
  Top Layer w0.26: VD4.2 47.75,13.67 48.3,14.22 50.6,14.22 51.1,13.72 54.7,13.72
  Top Layer w1.2: XP5.2 54.46,14.56 55.2,13.82 55.2,13.22 55.6,12.82 60.143,12.82 XP11.1
  Bottom Layer w1.5: XP11.1 61.847,13.43 VD8.1
NRST: R2.1 XP1.4 | length 12.3
  Bottom Layer w0.26: R2.1 42.101,11.899 44.22,9.78 XP1.4
POWEROUT_0: DD1.45 R7.2 R11.2 | length 43.1
  Top Layer w0.26: DD1.45 34.754,10.3 41.3,10.3 44.9,13.9 44.9,17.9 46,19 46,38.1 47.45,39.55 R11.2 R7.2
POWEROUT_1: DD1.44 R8.2 R12.2 | length 33.9
  Top Layer w0.26: DD1.44 34.746,9.6 42.2,9.6 46,13.4 46,17.4 46.7,18.1 46.7,25.5 48.8,27.6 48.8,29.39 R8.2@50.3,29.39
POWEROUT_2: DD1.43 R9.2 R13.2 | length 25.6
  Top Layer w0.26: DD1.43 34.639,9 43.6,9 46.6,12 46.6,14.3 48.8,16.5 48.8,19.23 R9.2@50.3,19.23
POWEROUT_3: DD1.41 R10.2 R14.2 | length 19.4
  Top Layer w0.26: DD1.41 33.825,8.4 46.8,8.4 47.45,9.05 R14.2 ; R14.2@48.8,9.07 R10.2@50.3,9.07
PROTDI_0: C6.1 DD1.12 R23.1 | length 23.7
  Top Layer w0.26: v1(21.2,33.5) 21.2,31.1 31.3,21 31.3,19.196 DD1.12 DD1.12@31.124,19.02
  Bottom Layer w0.26: C6.1 R23.1 21.1,33.6 v1(21.2,33.5)
PROTDI_1: C7.1 DD1.15 R24.1 | length 23.7
  Top Layer w0.26: C7.1 R24.1 19.2,31.8 25.1,25.9 25.1,20.661 DD1.15 27.316,18.444
PROTDI_2: C8.1 DD1.16 R25.1 | length 26.1
  Top Layer w0.26: v1(17.3,33.5) 17.3,32.6 24.3,25.6 24.3,20.754 DD1.16 26.963,18.091
  Bottom Layer w0.26: R25.1 C8.1 15.5,34 16,33.5 v1(17.3,33.5)
PROTDI_3: C9.1 DD1.17 R26.1 | length 24.6
  Top Layer w0.26: C9.1 R26.1 15.5,33.3 23.4,25.4 23.4,20.946 DD1.17
PWM_0: DD1.26 R27.1 | length 12.2
  Top Layer w0.26: R27.1 16.8,16.9 22,11.7 24.511,11.7 DD1.26
PWM_1: DD1.27 R28.1 | length 14.3
  Top Layer w0.26: R28.1 15.4,16.7 20.9,11.2 24.718,11.2 DD1.27
PWM_2: DD1.28 R29.1 | length 16.4
  Top Layer w0.26: R29.1 14,16.5 19.8,10.7 24.925,10.7 DD1.28
RESET: Power.6
RX: DD1.47 XP6.2 | length 9.8
  Top Layer w0.26: DD1.47 34.837,11.631 39.331,11.631 40.26,12.56 XP6.2
SPI_MISO: IOH.5 XP14.3 | length 3.2
  Top Layer w0.26: XP14.3@31.496,47.924 IOH.5 IOH.5@31.496,50.476
SPI_MOSI: IOH.4 XP14.2 | length 2.9
  Top Layer w0.26: XP14.2@34.036,47.924 IOH.4
SPI_SCK: IOH.6 XP14.1 | length 8.8
  Bottom Layer w0.26: IOH.6 30.456,49.3 35.2,49.3 XP14.1
SWIM: R1.1 XP1.2 | length 7.1
  Bottom Layer w0.26: R1.1 36.901,9.599 39.14,7.36 XP1.2
TX: DD1.46 XP6.1 | length 12.6
  Top Layer w0.26: DD1.46 34.801,10.959 40.259,10.959 42.8,13.5 XP6.1
VIN: Power.1
pads on no net: "Analog In.1" "Analog In.2" "Analog In.3" "Analog In.4" "Analog In.5" "Analog In.6" DD1.2 DD1.3 DD1.9 DD1.10 DD1.11 DD1.25 DD1.29 DD1.48 IOH.1 IOH.2 IOH.3 IOH.8 IOL.1 IOL.2 IOL.3 IOL.4 IOL.5 IOL.6 IOL.7 IOL.8 Power.8 XS1.0 XS2.0 XS3.0

## Polygon pours and split planes (outlines as drawn)
NetR3_2 on Top Layer "Top Layer-No Net" (solid, remove dead copper, pour order 1003): 65.122,36.493 50.772,36.493 50.772,42.993 65.122,42.993 65.122,36.493
NetR4_2 on Top Layer "Top Layer-No Net" (solid, remove dead copper, pour order 1002): 65.072,26.313 50.722,26.313 50.722,32.813 65.072,32.813 65.072,26.313
NetR5_2 on Top Layer "Top Layer-No Net" (solid, remove dead copper, pour order 1001): 65.126,16.203 50.776,16.203 50.776,22.603 65.126,22.603 65.126,16.203
NetR6_2 on Top Layer "Top Layer-No Net" (solid, remove dead copper, pour order 1000): 65.175,6 50.825,6 50.825,13.1 65.175,13.1 65.175,6

## Silkscreen, mask and mechanical layers (free items; w line width, h text height)
Top Solder:
  lines w1.5: 26,28.6 27.9,26.7 35.9,26.7 35.9,32.4 35.3,33 35.3,37.7 ; 26.9,37.7 26.9,43.2 ; 26.9,40.6 27,40.5 44.3,40.5 ; 32.5,22.1 34.4,24 ; 32.5,24 40.1,24 ; 40.1,21.2 40.1,26.7 ; 44.3,21.2 44.3,43.18 47.42,46.3 51.086,46.3 51.92,45.466
Bottom Solder:
  lines w1.5: 11.29,6.24 14.54,6.24 19.1,10.8 19.1,28.6 ; 11.29,22.14 12.04,22.14 14.4,24.5 14.4,30.6 11.29,33.71 11.29,37.94 ; 14.5,28.6 26,28.6 ; 26.9,37.7 26.9,43.2 ; 31.1,37.7 31.1,43.2 31.1,45.6 40.1,45.6 40.1,47.9 57,47.9 57,45.466 57,43.8 58.2,42.6 58.2,38.3 57,37.1 57,33.6 58.2,32.4 58.2,28.1 57,26.9 57,23.5 58.2,22.3 58.2,18 57,16.8 57,14.986 ; 32.5,24 28.6,24 23.5,18.9 23.5,9.3 25.3,7.5 36,7.5 36.6,6.9 36.6,5 38.1,3.5 38.1,2.54 ; 35.3,43.2 35.3,37.7 35.3,32.4 35.9,31.8 35.9,26.7 35.9,21.2 35.9,18.7 48.3,18.7 ; 40.1,21.2 40.1,45.8 ; 40.64,2.54 43.18,2.54 ; 41.9,2.54 41.9,4.1 42.5,4.7 46.5,4.7 48.3,6.5 48.3,9.72 ; 44.3,21.2 44.3,43.18 46.586,45.466 51.92,45.466 51.92,43.18 53.1,42 55.2,42 56.1,41.1 56.1,39.5 55,38.4 52.8,38.4 51.92,37.52 51.92,32.98 53.1,31.8 55.2,31.8 56.1,30.9 56.1,29.4 54.9,28.2 52.8,28.2 51.92,27.32 51.92,22.88 53.1,21.7 55.2,21.7 56.1,20.8 56.1,19.2 55,18.1 52.8,18.1 51.92,17.22 51.92,14.986 ; 48.3,19.88 54.1,19.88 ; 48.3,30.04 54.1,30.04 ; 54.1,9.72 48.3,9.72 ; 54.1,40.2 48.3,40.2 48.3,18.7 ; 48.3,9.72 48.3,18.7
Mechanical 3:
  the board outline again, w0.127